# Altium PCB ESC.PcbDoc (part 2 of 3)
Units mm, origin at the board's own origin, x right, y up, seen from the top; angles counter-clockwise.
Board outline 85 x 45 mm, 4 copper layers (L1-SIGNAL/PWR, L2-PWR, L3-GND, L4-SIGNAL/PWR), stack 1.571 mm thick; 139 components, 88 nets, 499 pads, 911 vias.
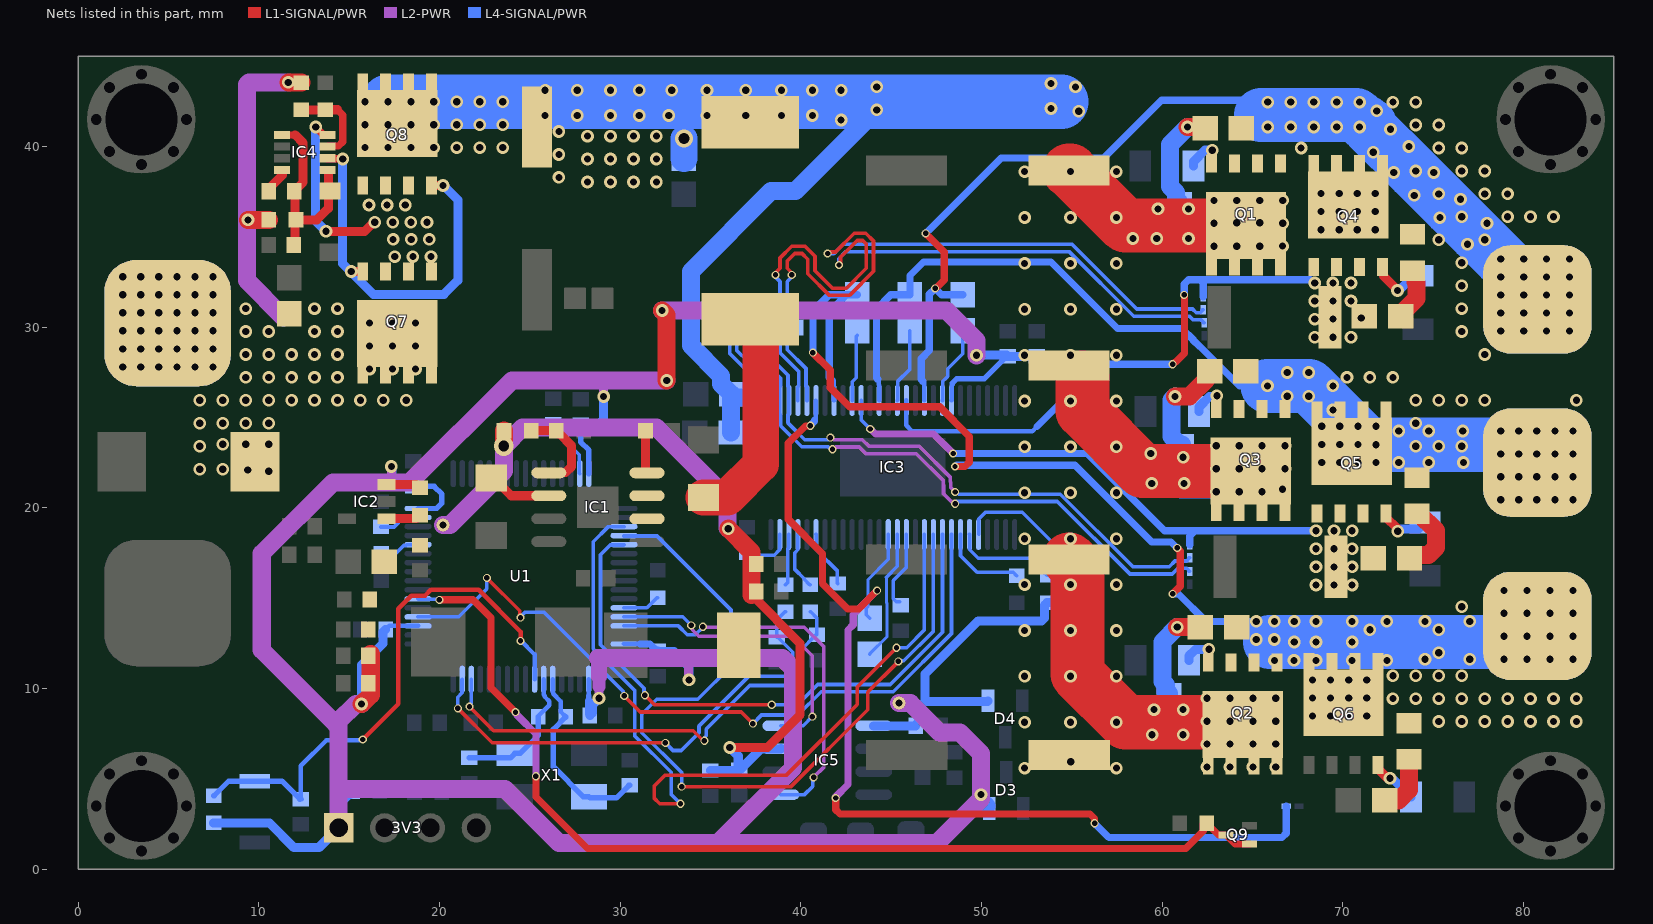
[diagram p4: the nets of this part, all layers, seen from the top]

## Via types
v1: diameter 0.7, hole 0.4, L1-SIGNAL/PWR to L4-SIGNAL/PWR, tented both sides, 386 vias
v2: diameter 0.7, hole 0.4, L1-SIGNAL/PWR to L4-SIGNAL/PWR, 181 vias
v3: diameter 0.7, hole 0.4, L1-SIGNAL/PWR to L4-SIGNAL/PWR, tented bottom, 112 vias
v4: diameter 0.45, hole 0.3, L1-SIGNAL/PWR to L4-SIGNAL/PWR, tented both sides, 87 vias
v5: diameter 0.7, hole 0.4, L1-SIGNAL/PWR to L2-PWR, tented both sides, 34 vias
v6: diameter 0.7, hole 0.4, L3-GND to L4-SIGNAL/PWR, tented both sides, 30 vias
v7: diameter 0.7, hole 0.4, L1-SIGNAL/PWR to L3-GND, 27 vias
v8: diameter 0.7, hole 0.4, L1-SIGNAL/PWR to L2-PWR, 21 vias
v9: diameter 0.7, hole 0.4, L3-GND to L4-SIGNAL/PWR, 10 vias
v10: diameter 1.1, hole 0.6, L1-SIGNAL/PWR to L4-SIGNAL/PWR, tented both sides, 10 vias
v11: diameter 0.7, hole 0.4, L1-SIGNAL/PWR to L3-GND, tented both sides, 8 vias
v12: diameter 1.1, hole 0.6, L3-GND to L4-SIGNAL/PWR, tented both sides, 3 vias
v13: diameter 0.7, hole 0.4, L1-SIGNAL/PWR to L4-SIGNAL/PWR, tented top, 1 vias
v14: diameter 1, hole 0.6, L1-SIGNAL/PWR to L4-SIGNAL/PWR, tented both sides, 1 vias

## Nets (pads, with @x,y where several pads share a name; then routed paths per layer and width w, separated by ;. In a path a pad name is that pad's centre, name@x,y a point inside that pad or via, vN(x,y) a via of type N, cw(c..) or ccw(c..) an arc to the next point about the centre after c; other vN are vias at no path point) (continued)
NetC9_2: C9.2 IC1.6 | length 3.6
  L1-SIGNAL/PWR w0.5: C9.2@22.86,21.659 22.981,21.659 23.971,20.669 IC1.6@26.048,20.669
NetC10_2: C10.2 R1.1 | length 5.9
  L1-SIGNAL/PWR w1: v1(61.404,41.084) 62.309,41.084 C10.2@62.373,41.021
  L4-SIGNAL/PWR w1: R1.1@60.96,36.907 60.838,36.907 60.771,36.973 60.771,37.45 60.437,37.785 60.437,40.117 v1(61.404,41.084)
NetC11_2: C11.2 R2.1 | length 5.7
  L1-SIGNAL/PWR w1: v1(60.708,26.166) 61.501,26.166 62.422,27.087 62.422,27.384 62.597,27.559 C11.2@62.627,27.559
  L4-SIGNAL/PWR w1: v1(60.708,26.166) 60.522,25.98 60.522,23.951 60.965,23.509 R2.1@61.087,23.509
NetC12_2: C12.2 R3.1 | length 5.5
  L1-SIGNAL/PWR w1: v1(60.833,13.399) C12.2@62.119,13.399
  L4-SIGNAL/PWR w1: R3.1@60.389,9.729 60.266,9.729 60.2,9.795 60.2,10.189 60.008,10.381 60.008,12.573 v1(60.833,13.399)
NetC13_1: C13.1 IC3.48 | length 4.3
  L4-SIGNAL/PWR w0.2: IC3.48@47.839,25.943 47.854,25.959 47.854,27.005 48.125,27.276 48.125,27.694 48.959,28.528 C13.1@48.959,29.794
NetC14_1: C14.1 IC3.15 | length 5.3
  L4-SIGNAL/PWR w0.17: C14.1@43.624,14.503 43.633,14.511 43.711,14.511 43.711,15.471 43.714,15.474 43.714,16.028 44.839,17.153
  L4-SIGNAL/PWR w0.2: C14.1@43.624,14.503 43.624,14.174 43.624,14.081 C14.1@43.815,13.891 ; 44.839,17.153 IC3.15@44.839,18.528
NetC14_2: C14.2 IC3.14 | length 7.3
  L4-SIGNAL/PWR w0.17: C14.2@43.815,11.89 43.815,11.92 44.775,12.88 44.775,14.714 44.731,14.758 44.731,16.156 44.738,16.163
  L4-SIGNAL/PWR w0.2: 44.738,16.163 45.339,16.764 IC3.14@45.339,18.528
NetC15_1: C15.1 IC3.43 | length 4.1
  L4-SIGNAL/PWR w0.2: IC3.43@45.339,25.943 45.354,25.959 45.354,26.989 46.038,27.672 C15.1@46.038,29.794
NetC16_2: C16.2 IC3.13 | length 4.3
  L4-SIGNAL/PWR w0.2: C16.2@45.471,14.797 45.289,14.797 45.116,14.97 45.116,15.975 45.839,16.698 IC3.13@45.839,18.528
NetC17_2: C17.2 R16.1 | length 3
  L1-SIGNAL/PWR w1: C17.2@73.193,30.719 73.341,30.719 73.405,30.782 73.405,30.93 74.074,31.6 74.074,32.47 74.039,32.505 74.039,33.067 73.973,33.133 R16.1@73.85,33.133
NetC18_2: C18.2 R17.1 | length 4.1
  L1-SIGNAL/PWR w1: C18.2@73.692,17.209 73.867,17.384 74.742,17.384 75.153,17.794 75.153,18.745 74.227,19.671 R17.1@74.105,19.671
NetC19_2: C19.2 R18.1 | length 3.3
  L1-SIGNAL/PWR w1: C19.2@72.311,3.81 73.074,3.81 73.66,4.396 R18.1@73.66,6.082
NetC20_1: C20.1 IC3.38 | length 3.7
  L4-SIGNAL/PWR w0.2: IC3.38@42.839,25.943 42.854,25.959 42.854,26.771 42.854,26.985 43.066,27.197 43.066,29.493 C20.1@43.116,29.543
NetC30_2: C30.2 IC3.23 | length 3.2
  L4-SIGNAL/PWR w0.2: IC3.23@40.839,18.528 40.854,18.513 40.854,17.673 40.899,17.629 42.025,16.502 42.025,15.825 C30.2@42.037,15.813
NetC31_1: C31.1 IC3.27 | length 2.9
  L4-SIGNAL/PWR w0.2: C31.1@37.02,17.525 37.174,17.371 38.521,17.371 38.824,17.673 38.824,18.513 IC3.27@38.839,18.528
NetC40_1: C40.1 IC4.4 | length 1.5
  L1-SIGNAL/PWR w0.4: IC4.4@11.275,38.699 11.278,38.699 11.303,38.674 11.303,38.417
  L1-SIGNAL/PWR w0.5: C40.1@10.548,37.528 10.548,37.663 11.303,38.417
NetC40_2: C40.2 C41.2 Dz1.1 IC4.1 IC4.5 R26.1 | length 11.6
  L1-SIGNAL/PWR w0.4: IC4.1@11.275,40.649 11.516,40.649 11.525,40.64 12.002,40.64 ; IC4.5@13.795,38.699 13.818,38.699 13.843,38.674 13.843,38.417
  L1-SIGNAL/PWR w0.5: C41.2@11.939,34.544 11.998,34.602 11.998,35.883 R26.1@12.056,35.941 ; 12.002,40.64 12.446,40.196 12.446,38.026 12.148,37.728 12.098,37.728 11.948,37.578 C40.2@11.948,37.528 12.002,37.474 12.002,35.995 R26.1@12.056,35.941 ; 13.843,38.417 13.843,37.625 Dz1.1@13.932,37.536 13.843,37.447 13.843,36.576 13.208,35.941 R26.1@12.056,35.941
NetC55_2: C55.2 U1.31 | length 2.3
  L4-SIGNAL/PWR w0.2: C55.2@16.757,18.943 17.482,18.943 17.985,19.445 18.792,19.445 U1.31@18.811,19.464
NetC56_2: C56.2 U1.47 | length 3.7
  L4-SIGNAL/PWR w0.2: C56.2@26.289,24.637 26.339,24.637 26.338,24.638 26.924,24.638 27.054,24.508 27.054,23.625 27.742,22.937 27.742,21.91 U1.47@27.761,21.891
NetIC1_4: IC1.4 R8.2 | length 2.4
  L1-SIGNAL/PWR w0.5: R8.2@31.403,24.277 31.403,21.986 31.45,21.939 IC1.4@31.488,21.939
NetIC1_5: IC1.5 R4.1 R11.1 | length 5.1
  L1-SIGNAL/PWR w0.5: R4.1@25.074,24.272 R11.1@26.47,24.272 26.47,24.244 26.624,24.09 26.652,24.09 27.305,23.438 27.305,22.283 26.981,21.959 26.067,21.959 IC1.5@26.048,21.939
NetIC2_3: IC2.3 R19.1 | length 1.9
  L1-SIGNAL/PWR w0.5: IC2.3@17.067,21.299 18.695,21.299 18.891,21.102 R19.1@18.92,21.102
NetIC3_5: IC3.5 R10.2 | length 8.1
  L4-SIGNAL/PWR w0.2: IC3.5@49.839,18.528 49.854,18.543 49.854,19.383 50.219,19.748 52.261,19.748 55.161,16.848 55.161,16.283 R10.2@55.182,16.262
NetIC3_6: IC3.6 R9.1 | length 6
  L4-SIGNAL/PWR w0.2: IC3.6@49.339,18.528 49.354,18.513 49.354,17.673 49.813,17.214 53.023,17.214 53.326,16.911 53.326,16.565 53.63,16.262 R9.1@53.658,16.262
NetIC3_7: IC3.7 R12.2 | length 4.7
  L4-SIGNAL/PWR w0.2: IC3.7@48.839,18.528 48.839,17.354 49.755,16.438 51.752,16.438 R12.2@51.943,16.247
NetIC3_25: IC3.25 R22.1 | length 3.2
  L4-SIGNAL/PWR w0.2: IC3.25@39.839,18.528 39.824,18.513 39.824,17.673 39.672,17.522 39.672,16.589 40.181,16.08 40.181,16.051 40.484,15.748 R22.1@40.513,15.748
NetIC3_26: IC3.26 R23.1 | length 2.9
  L4-SIGNAL/PWR w0.2: R23.1@39.15,15.748 39.272,15.871 39.272,17.723 39.339,17.789 IC3.26@39.339,18.528
NetIC4_6: IC4.6 Q7.4 Q8.4 | length 20.9
  L1-SIGNAL/PWR w0.4: IC4.6@13.795,39.349 13.815,39.329 14.618,39.329 v1(14.637,39.309)
  L1-SIGNAL/PWR w0.5: v1(15.113,33.084) 15.116,33.086 15.745,33.086 Q7.4@15.748,33.089 ; Q8.4@19.558,37.846 v1(20.193,37.846)
  L4-SIGNAL/PWR w0.5: v1(14.637,39.309) 14.637,33.514 16.338,31.813 20.238,31.813 21.018,32.594 21.018,37.045 20.218,37.846 v1(20.193,37.846)
NetIC4_7: IC4.7 R24.1 R25.2 | length 4.9
  L1-SIGNAL/PWR w0.4: IC4.7@13.795,39.999 13.82,40.024 14.411,40.024 14.645,40.258 14.645,41.743 14.351,42.037
  L1-SIGNAL/PWR w0.5: R24.1@12.345,42.034 R25.2@13.678,42.034 13.682,42.037 14.351,42.037
NetIC4_8: IC4.8 Q7.1 Q7.2 Q7.3 Q8.1 Q8.2 Q8.3 | length 9.8
  L1-SIGNAL/PWR w0.4: v1(13.144,41.084) 13.144,41.074 13.57,40.649 IC4.8@13.795,40.649
  L1-SIGNAL/PWR w0.5: v1(13.716,35.306) 15.853,35.306 16.361,35.814 v1(16.415,35.814)
  L4-SIGNAL/PWR w0.5: v1(13.144,41.084) 13.144,35.877 v1(13.716,35.306)
  other v1: 17.526,33.909 18.526,33.909 19.526,33.909 17.431,34.861 18.431,34.861 19.431,34.861 17.415,35.814 18.415,35.814 19.304,35.814 16.097,36.767 17.097,36.767 18.098,36.767
NetQ1_4: Q1.4 R5.2 | length 2.3
  L1-SIGNAL/PWR w0.5: Q1.4@62.738,39.058 62.757,39.078 62.757,39.776 v1(62.777,39.796)
  L4-SIGNAL/PWR w0.5: R5.2@61.74,38.925 61.74,39.172 62.364,39.796 v1(62.777,39.796)
NetQ2_4: Q2.4 R7.2 | length 2.3
  L1-SIGNAL/PWR w0.5: Q2.4@62.547,11.436 62.567,11.455 62.567,12.154 v1(62.586,12.173)
  L4-SIGNAL/PWR w0.5: R7.2@61.486,11.557 61.486,11.804 61.84,12.158 62.571,12.158 v1(62.586,12.173)
NetQ3_4: Q3.4 R6.2 | length 2.3
  L1-SIGNAL/PWR w0.5: Q3.4@62.992,25.469 63.011,25.489 63.011,26.192 v1(63.031,26.211)
  L4-SIGNAL/PWR w0.5: R6.2@62.039,25.336 62.039,25.583 62.629,26.173 62.993,26.173 v1(63.031,26.211)
NetQ4_4: Q4.4 R13.2 | length 3.1
  L1-SIGNAL/PWR w0.5: Q4.4@72.2,33.332 72.25,33.282 72.25,32.843 73.024,32.069 v1(73.024,32.035)
  L4-SIGNAL/PWR w0.5: v1(73.024,32.035) 73.062,32.073 73.146,32.073 73.921,32.848 R13.2@74.168,32.848
NetQ5_4: Q5.4 R14.2 | length 3
  L1-SIGNAL/PWR w0.5: Q5.4@72.39,19.679 72.39,19.479 73.006,18.863 73.006,18.738 v1(73.044,18.7)
  L4-SIGNAL/PWR w0.5: v1(73.044,18.7) 73.099,18.7 73.24,18.842 74.195,18.842 R14.2@74.549,19.195
NetQ6_4: Q6.4 R15.2 | length 2.8
  L1-SIGNAL/PWR w0.5: Q6.4@71.946,5.773 71.946,5.573 72.445,5.073 72.572,5.073 v1(72.61,5.035)
  L4-SIGNAL/PWR w0.5: v1(72.61,5.035) 72.648,4.997 72.772,4.997 73.168,4.601 73.415,4.601 73.769,4.247 R15.2@73.769,4
NetR28_1: R28.1 U1.28 | length 2.3
  L4-SIGNAL/PWR w0.2: R28.1@16.764,17.472 17.582,17.472 18.025,17.914 18.134,17.914 18.184,17.964 U1.28@18.811,17.964
NetR31_2: R31.2 U1.60 | length 2.1
  L4-SIGNAL/PWR w0.2: U1.60@30.211,14.464 31.481,14.464 32.049,15.033 R31.2@32.078,15.033
nSCS: IC3.8 U1.20 | length 42.3
  L1-SIGNAL/PWR w0.2: v4(22.619,16.12) 24.437,14.302 24.437,13.974 v4(24.485,13.926) ; v4(30.226,9.588) 31.115,8.7 36.703,8.7 v4(37.347,8.055)
  L4-SIGNAL/PWR w0.2: U1.20@18.811,13.964 21.07,13.964 22.619,15.513 v4(22.619,16.12) ; v4(24.485,13.926) 24.485,13.985 24.727,14.227 25.784,14.227 30.178,9.834 30.178,9.636 v4(30.226,9.588) ; v4(37.347,8.055) 37.824,8.532 39.837,8.532 41.129,9.824 45.118,9.824 48.339,13.045 IC3.8@48.339,18.528
OSC_IN: C57.2 R30.2 U1.5 X1.3 | length 10.7
  L4-SIGNAL/PWR w0.25: U1.5@26.261,10.514 26.271,10.505 26.271,9.801 26.286,9.786 26.286,9.717 26.701,9.303 26.701,8.724 R30.2@26.979,8.445
  L4-SIGNAL/PWR w0.3: R30.2@26.979,8.445 26.979,8.417 26.301,7.739 26.301,5.673 27.967,4.007 X1.3@28.267,4.007 28.33,3.944 29.795,3.944 30.485,4.634 C57.2@30.535,4.634
OSC_OUT: C58.1 R30.1 U1.6 X1.1 | length 7.8
  L4-SIGNAL/PWR w0.25: R30.1@25.472,8.445 25.472,8.474 26.079,9.081 26.079,9.288 25.836,9.531 25.836,9.599 25.77,9.665 25.77,10.505 U1.6@25.761,10.514
  L4-SIGNAL/PWR w0.3: C58.1@21.645,6.161 23.921,6.161 X1.1@24.167,6.407 24.467,6.407 25.472,7.412 R30.1@25.472,8.445
POWER_BUCK: C4.1 IC1.2 IC1.3 L1.2 | length 12.5
  L1-SIGNAL/PWR w2: C4.1@34.622,20.574 35.941,20.574 37.782,22.415 37.782,30.231 37.333,30.681 L1.2@37.211,30.681
POWER_IN: +.1 C21.2 D2.2 pad.1@4.953,30.226 Q7.5 Q7.6 Q7.7 Q7.8 Q7.9 R24.2 R26.2 | length 17.9
  L1-SIGNAL/PWR w1: v1(9.398,35.941) R26.2@10.55,35.941 ; v1(11.632,43.55) 11.641,43.54 R24.2@12.345,43.54
  L2-PWR w1: 11.367,30.543 9.335,32.575 9.335,43.434 9.45,43.55 v1(11.632,43.55)
  other v1: 6.731,22.14 8.001,22.14 6.731,23.41 8.001,23.522 6.731,24.68 8.001,24.68 9.271,24.68 10.541,24.68 6.731,25.95 8.001,25.95 9.271,25.95 10.541,25.95 11.811,25.95 13.081,25.95 14.351,25.95 15.621,25.95 16.891,25.95 18.161,25.95 9.271,27.22 10.541,27.22 11.811,27.22 13.081,27.22 14.351,27.22 9.271,28.49 10.541,28.49 11.811,28.49 13.081,28.49 14.351,28.49 9.271,29.76 10.541,29.76 13.081,29.76 14.351,29.76 9.271,31.03 13.081,31.03 14.351,31.03
  other v2: 2.461,27.798 3.461,27.798 4.461,27.798 5.461,27.798 6.461,27.798 7.461,27.798 2.461,28.798 3.461,28.798 4.461,28.798 5.461,28.798 6.461,28.798 7.461,28.798 2.461,29.798 3.461,29.798 4.461,29.798 5.461,29.798 6.461,29.798 7.461,29.798 2.461,30.797 3.461,30.797 4.461,30.797 5.461,30.797 6.461,30.797 7.461,30.797 2.461,31.798 3.461,31.798 4.461,31.798 5.461,31.798 6.461,31.798 7.461,31.798 2.461,32.798 3.461,32.798 4.461,32.798 5.461,32.798 6.461,32.798 7.461,32.798
  other v3: 10.541,22.028 9.383,22.099 9.271,23.522 10.541,23.522 16.129,27.686 17.399,27.686 18.669,27.686 16.129,28.956 17.399,28.956 18.669,28.956 16.129,30.226 17.399,30.226 18.669,30.226
POWER_LOAD: C5.2 C8.1 C34.2 C35.2 C36.1 C37.1 C38.1 C39.1 IC3.29 L1.1 Q1.5 Q1.6 Q1.7 Q1.8 Q1.9 Q2.5 Q2.6 Q2.7 Q2.8 Q2.9 Q3.5 Q3.6 Q3.7 Q3.8 Q3.9 Q8.5 Q8.6 Q8.7 Q8.8 Q8.9 R1.2 R2.2 R3.2 | length 119.2
  L1-SIGNAL/PWR w3: C38.1@54.847,17.145 55.308,16.683 55.308,10.795 57.975,8.128 Q2.9@63.754,8.128 ; C36.1@54.847,38.672 54.922,38.672 57.97,35.623 Q1.9@64.643,35.623 ; C37.1@55.597,27.202 55.597,25.366 58.928,22.034 Q3.9@64.897,22.034
  L4-SIGNAL/PWR w0.25: 37.782,25.908 37.818,25.943 IC3.29@38.339,25.943
  L4-SIGNAL/PWR w1: C34.2@36.138,24.168 C35.2@36.138,26.114 ; C35.2@36.153,26.289 35.588,26.854 35.588,27.298 33.909,28.977 33.909,33.084 38.354,37.529 39.695,37.529 v2(44.196,42.03) v2(44.196,43.3) ; C35.2@36.183,26.114 37.577,26.114 37.782,25.908
  L4-SIGNAL/PWR w1.5: C5.2@33.528,39.354 v14(33.528,40.45) ; R1.2@60.96,34.907 66.022,34.907
  L4-SIGNAL/PWR w2: R3.2@60.389,7.729 65.133,7.729 ; R2.2@61.087,21.509 65.232,21.509
  L4-SIGNAL/PWR w3: v2(17.145,42.481) v2(18.415,42.481) v2(19.685,42.481) v1(20.955,42.481) v1(22.225,42.481) v1(23.495,42.481) 36.957,42.481 54.432,42.481
  other v1: 62.484,9.461 63.754,9.461 65.024,9.461 28.194,38.036 29.464,38.036 30.734,38.036 32.004,38.036 26.607,38.291 28.194,39.306 29.464,39.306 30.734,39.306 32.004,39.306 26.607,39.56 15.875,39.941 17.145,39.941 18.415,39.941 19.685,39.941 20.955,39.941 22.225,39.941 23.495,39.941 28.194,40.576 29.464,40.576 30.734,40.576 32.004,40.576 26.607,40.831 20.955,41.211 22.225,41.211 23.495,41.211
  other v2: 15.875,41.211 17.145,41.211 18.415,41.211 19.685,41.211 42.227,41.465 25.832,41.719 27.622,41.719 29.464,41.719 31.051,41.719 32.684,41.719 34.808,41.719 36.957,41.719 38.925,41.719 40.64,41.719 55.387,41.948 53.848,42.106 15.875,42.481 25.845,43.116 27.622,43.116 29.464,43.116 31.051,43.116 32.854,43.116 34.808,43.116 36.957,43.116 38.925,43.116 40.64,43.116 42.227,43.116 55.2,43.3 53.848,43.486
  other v3: 62.484,5.651 63.754,5.651 65.024,5.651 66.294,5.651 62.484,6.921 63.754,6.921 65.024,6.921 66.294,6.921 62.484,8.191 63.754,8.191 65.024,8.191 66.294,8.191 66.294,9.461 62.992,20.892 64.262,20.892 65.532,20.892 66.669,21.025 62.992,22.162 64.262,22.162 65.532,22.162 66.802,22.162 62.992,23.431 64.262,23.431 65.532,23.431 66.802,23.431 62.865,34.48 64.135,34.48 65.405,34.48 66.669,34.487 62.865,35.75 66.675,35.75 64.135,35.782 65.405,35.782 62.865,37.02 64.135,37.02 65.405,37.02 66.675,37.02
  other v5: 52.387,5.593 57.468,5.593 52.387,8.133 54.927,8.133 52.387,10.673 54.927,10.673 52.387,13.213 54.927,13.213 57.468,13.213 52.387,15.753 54.927,15.753 57.468,15.753 52.387,18.293 54.927,18.293 57.468,18.293 52.387,20.833 54.927,20.833 57.468,20.833 52.387,23.373 54.927,23.373 52.387,25.913 57.468,25.913 52.387,28.453 57.468,28.453 52.387,30.993 54.927,30.993 57.468,30.993 52.387,33.533 54.927,33.533 57.468,33.533 52.387,36.073 54.927,36.073 52.387,38.613 57.468,38.613
  other v8: 54.938,5.946 59.445,7.435 61.161,7.435 57.468,8.133 59.551,8.831 61.161,8.831 57.468,10.673 59.424,21.353 61.217,21.353 61.159,22.796 59.374,23.01 57.468,23.373 54.927,25.913 54.927,28.453 58.379,34.907 59.699,34.907 61.46,34.907 57.468,36.073 59.771,36.547 61.46,36.547 54.927,38.613
RESET: C51.1 R27.1 SW1.1 U1.7 | length 30.7
  L1-SIGNAL/PWR w0.25: v4(15.748,7.175) 17.716,9.144 17.716,14.414 18.439,15.137 19.2,15.137 19.521,15.458 22.175,15.458 24.485,13.149 v4(24.485,12.636)
  L4-SIGNAL/PWR w0.25: C51.1@12.269,3.875 C51.1@12.319,3.875 ; C51.1@12.369,3.875 C51.1@12.319,3.875 ; v4(15.748,7.175) 15.71,7.137 13.741,7.137 12.319,5.715 C51.1@12.319,3.875 ; v4@24.485,12.674 v4(24.485,12.636) 24.511,12.636 25.261,11.886 U1.7@25.261,10.514
  L4-SIGNAL/PWR w0.3: R27.1@7.493,4.064 7.522,4.064 8.333,4.875 SW1.1@9.779,4.875 11.269,4.875 C51.1@12.269,3.875
RX: IC5.4 U1.61 | length 16.8
  L2-PWR w0.2: v4(33.936,13.495) 33.984,13.447 33.984,13.27 34.01,13.243 34.01,13.227 34.347,12.89 39.564,12.89 40.64,11.814 v4(40.64,8.445)
  L4-SIGNAL/PWR w0.2: U1.61@30.211,13.964 33.466,13.964 v4(33.936,13.495) ; IC5.4@38.895,7.938 40.132,7.938 v4(40.64,8.445)
S1_N: C28.2 IC3.33 J8.1 | length 43.4
  L1-SIGNAL/PWR w0.2: v4(39.497,32.893) 39.497,33.01 39.247,33.26 39.247,33.663 39.662,34.079 40.069,34.079 40.386,33.762 40.386,32.957 41.583,31.76 42.69,31.76 44.024,33.094 44.024,34.773 43.6,35.198 42.951,35.198 41.915,34.162 41.561,34.162 v4(41.478,34.079)
  L4-SIGNAL/PWR w0.2: v4(39.497,32.893) 39.497,32.776 39.247,32.526 39.247,30.445 39.364,30.328 39.446,30.328 39.746,30.028 C28.2@39.746,29.978 39.746,29.928 39.446,29.628 39.364,29.628 39.247,29.511 39.247,28.757 40.289,27.715 40.289,26.732 40.339,26.682 IC3.33@40.339,25.943 ; v4(41.478,34.079) 41.832,34.079 42.338,34.585 55.009,34.585 58.588,31.007 61.678,31.007 61.882,30.802 62.106,30.802 62.223,30.919 62.223,30.96 62.225,30.962 J8.1@62.275,30.962
S1_P: C28.1 IC3.32 J10.1 | length 42.1
  L1-SIGNAL/PWR w0.2: v4(38.597,32.893) 38.597,33.01 38.847,33.26 38.847,33.829 39.497,34.479 40.234,34.479 40.786,33.927 40.786,33.122 41.748,32.16 42.524,32.16 43.624,33.26 43.624,34.608 43.434,34.798 43.116,34.798 42.198,33.879 42.198,33.525 v4(42.115,33.443)
  L4-SIGNAL/PWR w0.2: v4(38.597,32.893) 38.597,32.776 38.847,32.526 38.847,30.445 38.729,30.328 38.647,30.328 38.347,30.028 C28.1@38.347,29.978 38.347,29.928 38.647,29.628 38.729,29.628 38.847,29.511 38.847,28.592 39.889,27.55 39.889,26.732 39.839,26.682 IC3.32@39.839,25.943 ; v4(42.115,33.443) 42.115,33.796 42.503,34.185 54.844,34.185 58.422,30.607 61.512,30.607 61.717,30.402 62.154,30.402 62.271,30.285 62.271,30.244 62.273,30.242 J10.1@62.323,30.242
S2_N: C29.2 IC3.31 J9.1 | length 33.8
  L2-PWR w0.2: v4(41.633,23.885) 41.701,23.885 41.815,23.771 43.406,23.771 43.775,23.402 46.557,23.402 48.28,21.679 48.28,21.438 48.294,21.424 48.294,21.121 48.536,20.879 v4(48.54,20.879) v4@48.54,20.904
  L4-SIGNAL/PWR w0.2: C29.2@36.96,29.978 36.96,29.928 36.66,29.628 36.577,29.628 36.46,29.511 36.46,28.709 37.053,28.115 38.512,28.115 39.289,27.339 39.289,26.732 39.339,26.682 IC3.31@39.339,25.943 39.339,25.204 39.289,25.154 39.289,24.702 40.215,23.775 41.523,23.775 v4(41.633,23.885) ; v4(48.54,20.879) 48.608,20.879 48.733,20.754 54.367,20.754 58.384,16.736 60.391,16.736 60.713,17.059 61.362,17.059 61.479,17.176 61.479,17.232 61.481,17.234 J9.1@61.531,17.234
S2_P: C29.1 IC3.30 J11.1 | length 34.5
  L2-PWR w0.2: v4(41.751,23.246) 41.819,23.246 41.944,23.371 43.24,23.371 43.609,23.002 46.391,23.002 47.88,21.513 47.88,21.272 47.894,21.258 47.894,20.783 48.323,20.354 48.348,20.354 48.473,20.229 v4(48.54,20.229)
  L4-SIGNAL/PWR w0.2: C29.1@35.56,29.978 35.56,29.928 35.86,29.628 35.943,29.628 36.06,29.511 36.06,29.274 ; 36.06,29.226 36.06,28.543 36.888,27.715 38.347,27.715 38.889,27.173 38.889,26.732 38.839,26.682 IC3.30@38.839,25.943 38.839,25.204 38.889,25.154 38.889,24.536 40.049,23.375 41.506,23.375 v4@41.631,23.25 ; v4@48.507,20.229 48.632,20.354 54.201,20.354 58.218,16.337 60.556,16.337 60.879,16.659 61.362,16.659 61.479,16.542 61.479,16.486 61.481,16.485 J11.1@61.531,16.485
SCLK: IC3.11 U1.51 | length 45.2
  L1-SIGNAL/PWR w0.2: v4(33.337,3.619) 32.194,3.619 31.877,3.937 31.877,4.584 32.5,5.207 39.211,5.207 43.123,9.119 43.123,10.088 v4(45.293,12.258)
  L4-SIGNAL/PWR w0.2: U1.51@30.211,18.964 30.192,18.945 29.327,18.945 28.511,18.13 28.511,12.192 30.797,9.906 30.797,7.39 32.829,5.358 32.829,4.127 v4(33.337,3.619) ; v4(45.293,12.258) 45.855,12.258 46.839,13.242 IC3.11@46.839,18.528
SDI: IC3.9 U1.53 | length 34.1
  L1-SIGNAL/PWR w0.2: v4(31.369,9.626) 31.895,9.099 v4(38.392,9.099)
  L4-SIGNAL/PWR w0.2: U1.53@30.211,17.964 30.192,17.945 29.456,17.945 28.911,17.401 28.911,12.427 31.321,10.017 31.321,9.673 v4(31.369,9.626) ; v4(38.392,9.099) 39.813,9.099 40.937,10.223 44.952,10.223 47.839,13.11 IC3.9@47.839,18.528
SDO: IC3.10 U1.52 | length 45.1
  L1-SIGNAL/PWR w0.2: v4(33.401,4.572) 39.453,4.572 43.705,8.824 43.705,9.802 v4(45.402,11.498)
  L4-SIGNAL/PWR w0.2: U1.52@30.211,18.439 32.043,18.439 36.131,14.351 36.131,11.238 34.291,9.398 32.023,9.398 31.197,8.572 31.197,7.556 33.401,5.352 v4(33.401,4.572) ; v4(45.402,11.498) 45.444,11.54 45.703,11.54 47.339,13.176 IC3.10@47.339,18.528
SH_A: "MOTOR U.1" C10.1 C13.2 IC3.46 Q1.1 Q1.2 Q1.3 Q4.5 Q4.6 Q4.7 Q4.8 Q4.9 R16.2 | length 53.2
  L1-SIGNAL/PWR w0.4: v4(46.909,35.19) 47.942,34.156 47.942,32.617 47.484,32.158 47.444,32.158 v4(47.434,32.149)
  L4-SIGNAL/PWR w0.25: 46.754,27.006 46.833,26.927 46.833,25.949 IC3.46@46.839,25.943
  L4-SIGNAL/PWR w0.4: 46.754,27.006 46.754,27.026 46.661,27.119 46.661,28.253 47.113,28.704 47.113,31.827 v4(47.434,32.149) 47.79,31.794 C13.2@48.959,31.794 ; v4(46.909,35.19) 51.089,39.37 56.769,39.37 59.958,42.559 64.971,42.559 65.07,42.46 65.151,42.46
  L4-SIGNAL/PWR w3: 65.482,41.749 67.12,41.749 68.389,41.749 70.737,41.749 71.146,41.34 71.27,41.34 71.42,41.19 71.501,41.19 ; 71.417,41.105 73.956,38.566 75.978,36.544 77.375,35.147 v2(78.74,33.782) 79.375,33.147 80.51,32.012 80.878,31.644 81.09,31.432
  other v1: 77.851,28.49 76.581,29.76 76.581,31.03 76.581,32.3 76.581,33.57 76.898,34.585 75.311,34.84 77.851,34.84 77.978,35.75 75.374,36.068 76.581,36.11 79.121,36.11 80.391,36.11 81.661,36.11 76.517,37.084 73.957,37.295 75.311,37.38 77.851,37.38 79.121,37.38 72.817,38.565 75.036,38.565 74.041,38.65 76.581,38.65 77.851,38.65 71.691,39.688 67.691,39.92 75.311,39.92 76.581,39.92 73.66,40.005 72.644,40.957 65.849,41.084 67.12,41.084 68.389,41.084 69.659,41.084 70.929,41.084 74.041,41.19 75.311,41.19 71.882,41.973 65.849,42.46 67.12,42.46 68.389,42.46 69.659,42.46 70.929,42.46 72.771,42.46 74.041,42.46
  other v2: 78.74,29.782 80.01,29.782 81.28,29.782 82.55,29.782 78.74,30.782 80.01,30.782 81.28,30.782 82.55,30.782 78.74,31.782 80.01,31.782 81.28,31.782 82.55,31.782 78.74,32.782 80.01,32.782 81.28,32.782 82.55,32.782 80.01,33.782 81.28,33.782 82.55,33.782
  other v3: 68.8,35.4 69.8,35.4 70.8,35.4 71.8,35.4 68.8,36.4 69.8,36.4 70.8,36.4 71.8,36.4 68.8,37.4 69.8,37.4 70.8,37.4 71.8,37.4
SH_B: "MOTOR V.1" C11.1 C15.2 IC3.41 Q3.1 Q3.2 Q3.3 Q5.5 Q5.6 Q5.7 Q5.8 Q5.9 R17.2 | length 48
  L4-SIGNAL/PWR w0.25: 44.254,27.124 44.304,27.075 44.304,26.805 44.333,26.776 44.333,25.949 IC3.41@44.339,25.943
  L4-SIGNAL/PWR w0.4: 44.254,27.124 44.183,27.196 44.183,28.914 44.192,28.923 44.192,30.664 44.183,30.673 44.183,31.005 44.971,31.794 C15.2@46.038,31.794 46.047,31.803 46.047,32.864 46.787,33.605 53.849,33.605 57.525,29.929 61.102,29.929 61.723,29.307 61.723,29.283 62.075,28.931 62.1,28.931 64.281,26.749 v1(65.834,26.749)
  L4-SIGNAL/PWR w3: v1(65.834,26.749) 68.12,26.749 71.374,23.495 79.777,23.495 80.772,22.5
  other v1: 73.094,22.511 74.76,22.511 76.676,22.511 74.041,23.41 75.311,23.41 76.581,23.41 73.094,24.257 74.76,24.257 76.644,24.257 74.041,24.68 69.453,25.416 74.041,25.95 75.311,25.95 76.581,25.95 77.851,25.95 82.931,25.95 66.929,26.173 68.12,26.173 69.453,26.749 70.231,27.22 71.501,27.22 72.771,27.22 66.929,27.495 68.12,27.495
  other v2: 78.74,20.448 79.74,20.448 80.74,20.448 81.74,20.448 82.74,20.448 78.74,21.718 79.74,21.718 80.74,21.718 81.74,21.718 82.74,21.718 78.74,22.988 79.74,22.988 80.74,22.988 81.74,22.988 82.74,22.988 78.74,24.258 79.74,24.258 80.74,24.258 81.74,24.258 82.74,24.258
  other v3: 68.834,22.511 69.834,22.511 70.834,22.511 71.834,22.511 71.834,23.495 68.834,23.511 69.834,23.511 70.834,23.511 68.834,24.511 69.834,24.511 70.834,24.511 71.834,24.511
SH_C: "MOTOR W.1" C12.1 C20.2 IC3.36 Q2.1 Q2.2 Q2.3 Q6.5 Q6.6 Q6.7 Q6.8 Q6.9 R18.2 | length 63.1
  L1-SIGNAL/PWR w0.4: v4(40.666,28.592) 41.633,27.625 41.633,26.646 42.689,25.59 47.689,25.59 49.324,23.955 49.324,22.523 49.09,22.288 v4@48.548,22.288 ; v4(60.579,15.24) 61.005,15.666 61.005,17.595 60.833,17.766 v4(60.833,17.78)
  L4-SIGNAL/PWR w0.2: v4(60.579,15.24) v4@60.591,15.228
  L4-SIGNAL/PWR w0.25: 41.754,27.006 41.833,26.927 41.833,25.949 IC3.36@41.839,25.943
  L4-SIGNAL/PWR w0.4: v4(40.666,28.592) 40.666,30.887 41.573,31.794 C20.2@42.525,31.794 ; 41.754,27.006 41.754,27.042 41.573,27.224 41.573,30.841 C20.2@42.525,31.794 ; C20.2@43.116,31.794 43.116,31.803 43.107,31.794 C20.2@42.525,31.794 ; v4(48.535,22.288) 48.548,22.288 48.612,22.352 55.181,22.352 59.424,18.109 60.49,18.109 60.819,17.78 v4(60.833,17.78) ; v4@60.591,15.228 60.909,15.228 62.42,13.716 v1(65.215,13.716)
  L4-SIGNAL/PWR w3: v1@65.977,12.573 80.613,12.573 81.47,13.43
  other v1: 75.311,8.17 76.581,8.17 77.851,8.17 79.121,8.17 80.391,8.17 81.661,8.17 82.931,8.17 72.771,9.44 74.041,9.44 75.311,9.44 76.581,9.44 77.851,9.44 79.121,9.44 80.391,9.44 81.661,9.44 82.931,9.44 72.771,10.71 74.041,10.71 75.311,10.71 76.581,10.71 66.215,11.557 67.297,11.557 68.516,11.557 70.517,11.557 72.44,11.557 74.549,11.62 77.025,11.62 75.311,11.98 67.31,12.573 68.516,12.573 70.517,12.573 65.215,12.716 66.215,12.716 71.501,13.25 75.311,13.25 66.215,13.716 67.31,13.716 68.516,13.716 70.517,13.716 72.44,13.716 74.549,13.716 77.025,13.716 76.581,14.52
  other v2: 78.93,11.62 80.2,11.62 81.47,11.62 82.74,11.62 78.93,12.89 80.2,12.89 81.47,12.89 82.74,12.89 78.93,14.16 80.2,14.16 81.47,14.16 82.74,14.16 78.93,15.43 80.2,15.43 81.47,15.43 82.74,15.43
  other v3: 68.326,8.477 69.326,8.477 70.326,8.477 71.326,8.477 68.326,9.477 69.326,9.477 70.326,9.477 71.326,9.477 68.326,10.477 69.326,10.477 70.326,10.477 71.326,10.477
SL_A: C17.1 IC3.44 J8.2 Q4.1 Q4.2 Q4.3 R20.2 | length 31
  L1-SIGNAL/PWR w0.4: v4(60.579,27.951) 60.593,27.951 60.721,28.079 60.758,28.079 61.237,28.558 61.237,31.729 61.227,31.739 61.227,31.779 v4(61.218,31.789)
  L4-SIGNAL/PWR w0.2: J8.2@62.271,31.668 J8.2@62.275,31.673
  L4-SIGNAL/PWR w0.25: IC3.44@45.839,25.943 45.839,24.565 46.157,24.246 52.821,24.246 53.075,24.5
  L4-SIGNAL/PWR w0.4: 53.075,24.5 56.526,27.951 v4(60.579,27.951) ; v4@61.218,31.803 61.218,32.385 61.46,32.627 62.106,32.627 ; J8.2@62.275,31.673 62.275,32.458 62.106,32.627 ; v1(68.453,32.448) 68.372,32.448 68.193,32.627 62.106,32.627
  other v1: 68.453,29.449 70.453,29.449 68.453,30.448 68.453,31.448 70.453,31.448 69.453,32.448 70.453,32.448
  other v2: 71.025,30.512
  other v3: 69.453,29.449 69.453,30.448 69.453,31.448
SL_B: C18.1 IC3.39 J9.2 Q5.1 Q5.2 Q5.3 R21.2 | length 29.6
  L2-PWR w0.4: v4(43.841,24.366) 43.854,24.366 44.127,24.094 47.343,24.094 v4@48.417,23.02
  L4-SIGNAL/PWR w0.2: IC3.39@43.339,25.943 43.354,25.928 43.354,24.853 v4(43.841,24.366)
  L4-SIGNAL/PWR w0.4: v4(48.426,23.01) 55.857,23.01 60.135,18.732 61.806,18.732 62.045,18.732 ; J9.2@61.531,17.945 61.531,18.438 61.806,18.713 ; 62.065,18.732 v1(68.516,18.732)
  other v1: 68.516,15.733 70.517,15.733 68.516,16.732 68.516,17.732 69.517,18.732 70.517,18.732
  other v3: 69.517,15.733 69.517,16.732 70.517,16.732 69.517,17.732 70.517,17.732
SL_C: IC3.34 J7.1 | length 56.1
  L1-SIGNAL/PWR w0.4: v4(40.525,24.545) 40.515,24.535 40.257,24.535 39.306,23.585 39.306,19.362 41.192,17.476 41.192,15.807 42.592,14.407 43.206,14.407 v4(44.221,15.422) ; v4(41.927,3.937) 41.934,3.93 41.934,3.282 42.168,3.048 56.002,3.048 56.251,2.798 56.251,2.55 v4(56.261,2.54)
  L2-PWR w0.4: v4(41.927,3.937) 41.927,4.005 42.608,4.686 42.608,13.242 42.895,13.529 42.895,14.096 v4(44.221,15.422)
  L4-SIGNAL/PWR w0.25: 40.758,24.853 40.833,24.928 IC3.34@40.833,25.937
  L4-SIGNAL/PWR w0.4: v4(40.525,24.545) 40.525,24.559 40.758,24.791 40.758,24.853 ; v4(56.261,2.54) 57.051,1.75 66.631,1.75 66.865,1.984 J7.1@66.865,3.492
SO1: C32.2 R22.2 U1.14 | length 26.6
  L1-SIGNAL/PWR w0.2: v4(21.66,8.998) 22.993,7.666 34.039,7.666 34.596,7.109 v4(34.663,7.109)
  L4-SIGNAL/PWR w0.2: v4(21.66,8.998) 21.66,9.066 21.761,9.167 U1.14@21.761,10.514 ; v4(34.663,7.109) 34.711,7.157 34.711,7.334 34.76,7.383 34.76,7.755 37.171,10.165 39.529,10.165 39.96,10.597 39.96,12.091 40.841,12.972 C32.2@40.891,12.972 40.891,13.892 40.542,14.242 R22.2@40.513,14.242
SO2: C33.2 R23.2 U1.15 | length 27.2
  L1-SIGNAL/PWR w0.2: v4(21.018,8.898) 22.925,6.991 v4(32.505,6.991)
  L4-SIGNAL/PWR w0.2: v4(21.018,8.898) 21.006,8.91 21.006,9.523 21.242,9.759 21.242,10.495 U1.15@21.261,10.514 ; v4(32.505,6.991) 32.926,6.57 33.381,6.57 34.36,7.549 34.36,7.921 37.107,10.668 39.37,10.668 39.56,10.858 39.56,12.003 38.719,12.845 C33.2@38.669,12.845 38.669,13.76 38.818,13.91 38.818,13.938 39.121,14.242 R23.2@39.15,14.242
TEMP: Q9.1 Q9.3 R33.1 U1.22 | length 57.4
  L1-SIGNAL/PWR w0.4: v4(19.993,14.908) 21.858,14.908 22.851,13.915 22.851,10.043 v4(24.204,8.691) ; v4(25.336,5.143) 25.336,4 28.187,1.15 61.305,1.15 62.272,2.117 62.272,2.498 62.285,2.511 R33.1@62.475,2.511 ; R33.1@62.475,2.54 R33.1@62.475,2.511 ; Q9.1@64.834,1.397 64.034,1.397 Q9.3@63.534,1.897 63.118,1.897 62.707,2.308 62.678,2.308 R33.1@62.475,2.511
  L2-PWR w0.4: v4(24.204,8.691) 24.204,8.624 24.329,8.499 24.329,8.492 25.336,7.484 v4(25.336,5.143)
  L4-SIGNAL/PWR w0.2: U1.22@18.811,14.964 18.83,14.945 19.956,14.945 v4(19.993,14.908)
TX: IC5.1 U1.62 | length 21.9
  L2-PWR w0.2: v4(34.581,13.416) 34.598,13.399 40.196,13.399 41.278,12.316 41.278,5.655 v4(40.703,5.08)
  L4-SIGNAL/PWR w0.2: U1.62@30.211,13.464 33.224,13.464 33.72,12.968 34.151,12.968 34.581,13.397 v4(34.581,13.416) ; IC5.1@38.895,4.128 40.202,4.128 40.656,4.581 40.656,5.032 v4(40.703,5.08)
V_5V: C6.2 C7.2 C22.2 C48.2 C49.2 IC2.1 IC5.3 L2.2 R4.2 R19.2 | length 47.3
  L1-SIGNAL/PWR w0.5: IC2.1@17.067,19.399 18.695,19.399 18.891,19.596 R19.2@18.92,19.596 ; v1(36.068,6.731) 38.149,6.731 39.965,8.547 39.965,12.489 C7.2@37.274,15.18
  L1-SIGNAL/PWR w1: v10(23.558,23.431) 23.567,23.44 R4.2@23.567,24.272 ; v1(35.985,18.845) 37.274,17.556 37.274,16.891 C7.2@37.274,15.18
  L2-PWR w1: v1(20.193,19.05) 20.574,19.05 23.558,22.034 v10(23.558,23.431) 23.586,23.431 24.602,24.447 32.004,24.447 35.941,20.511 35.941,18.889 v1(35.985,18.845)
  L4-SIGNAL/PWR w0.5: C49.2@34.988,5.462 36.498,5.462 36.598,5.462 37.786,6.651 38.879,6.651 IC5.3@38.895,6.668 ; v1(36.068,6.731) 36.536,6.263 C48.2@36.536,5.5
VDD_SPI: 3V3.1 C1.2 C2.2 C25.2 C26.2 C27.2 C42.2 C43.2 C44.2 C45.2 C46.2 C47.2 C50.2 D3.2 D4.1 IC3.49 IC5.5 L3.2 R9.2 R10.1 R27.2 R32.2 U1.1 U1.19 U1.32 U1.48 U1.64 | length 210
  L1-SIGNAL/PWR w1: v1(15.684,9.144) 16.192,9.652 C27.2@16.192,11.901 ; v1(32.322,30.924) 32.575,30.67 v1(32.575,27.051)
  L2-PWR w0.5: 17.335,21.528 v1(17.335,22.288) ; v1(28.829,9.461) 28.829,10.096 ; v1(29.083,26.162) 29.083,27.051 ; 33.782,11.684 33.782,10.502 v1(33.807,10.477)
  L2-PWR w0.7: 28.829,10.096 28.829,10.668
  L2-PWR w0.9: 28.765,11.684 28.829,11.62 28.829,10.668
  L2-PWR w1: 3V3.1@14.414,2.286 14.414,4.445 ; v1(15.684,9.144) 15.367,9.144 14.414,8.191 ; 28.765,11.684 33.782,11.684 38.975,11.684 39.56,11.098 39.56,5.588 35.422,1.45 ; v1(32.322,30.924) 48.069,30.924 49.721,29.273 v1(49.721,28.448) ; v1(32.575,27.051) 29.083,27.051 24,27.051 18.348,21.399 14.097,21.399 10.16,17.462 10.16,12.128 14.256,8.033 14.414,8.191 ; v1(45.436,9.2) 46.057,9.2 47.686,7.571 48.803,7.571 49.974,6.399 v1(49.974,4.127) 49.974,3.888 47.537,1.45 35.422,1.45 ; 14.414,4.445 23.614,4.445 26.609,1.45 35.422,1.45 ; 14.414,4.445 14.414,8.191
  L4-SIGNAL/PWR w0.25: C47.2@17.019,13.272 17.212,13.464 U1.19@18.811,13.464 ; 28.258,9.588 28.258,10.511 U1.1@28.261,10.514 ; U1.64@30.211,12.464 31.115,12.464 ; IC3.49@48.339,25.943 48.345,25.949 48.345,26.807 48.387,26.849
  L4-SIGNAL/PWR w0.3: C46.2@18.542,21.191 19.703,21.191 20.13,20.765 20.13,20.256 19.837,19.964 U1.32@18.811,19.964 ; C45.2@27.812,24.613 27.812,23.651 28.261,23.202 U1.48@28.261,21.891 ; 28.258,9.335 28.258,9.588 ; C44.2@32.065,12.063 C44.2@32.085,12.083 ; 48.387,26.849 48.387,26.901 48.636,27.151 50.164,27.151 51.396,28.383 C1.2@51.446,28.383
  L4-SIGNAL/PWR w0.4: 28.258,9.335 28.258,8.571 C43.2@28.32,8.509 ; 31.115,12.464 31.654,12.464 32.055,12.063 C44.2@32.065,12.063
  L4-SIGNAL/PWR w0.5: R27.2@7.493,2.558 10.583,2.558 11.94,1.2 13.329,1.2 3V3.1@14.414,2.286 14.42,2.292 14.42,3.553 15.003,4.136 15.032,4.136 15.185,4.289 R32.2@15.185,4.318 ; v1(15.684,9.144) 15.684,11.303 16.881,12.499 16.881,13.133 C47.2@17.019,13.272 ; v1(17.335,22.288) 17.359,22.265 17.359,21.505 17.652,21.212 18.521,21.212 C46.2@18.542,21.191 ; C45.2@27.812,24.613 28.002,24.613 28.012,24.622 28.79,24.622 29.083,24.915 v1(29.083,26.162) ; C43.2@28.32,8.509 28.47,8.659 28.47,9.102 v1(28.829,9.461) ; C44.2@32.085,12.083 32.114,12.054 32.967,12.054 33.807,11.215 v1(33.807,10.477) ; IC5.5@44.036,7.938 C50.2@46.354,7.937 46.354,7.987 46.504,8.137 46.504,8.93 ; v1(45.436,9.2) 45.474,9.161 46.272,9.161 46.504,8.93 ; 46.711,9.137 46.504,8.93 ; v1(49.721,28.448) 51.382,28.448 C1.2@51.446,28.383 C2.2@53.054,28.383 ; D4.1@50.359,9.313 50.338,9.292 46.884,9.292 46.884,10.812 49.82,13.748 53.326,13.748 53.476,13.898 53.476,14.602 53.63,14.755 R9.2@53.658,14.755 R10.1@55.182,14.755
  L4-SIGNAL/PWR w1: v1(49.974,4.127) 49.974,3.78 D3.2@50.27,3.485
pads on no net: IC2.4 IC3.1 IC3.2 IC3.3 IC3.4 IC3.50 IC3.51 IC3.52 IC3.53 IC3.54 IC3.56 IC4.3 U1.2 U1.3 U1.4 U1.8 U1.9 U1.16 U1.17 U1.21 U1.23 U1.24 U1.25 U1.26 U1.27 U1.29 U1.30 U1.33 U1.37 U1.38 U1.39 U1.40 U1.44 U1.45 U1.50 U1.54 U1.55 U1.56 U1.57 U1.58 U1.59 U1.63

## Polygon pours and split planes (outlines as drawn)
GND on L1-SIGNAL/PWR "GND_L01_P006" (solid, pour order 6): 0,45 85,45 85,0 0,0
POWER_LOAD on L1-SIGNAL/PWR "POWER_LOAD_L01_P003" (solid, pour order 3): 15.494,38.925 15.494,44.069 59.755,44.069 59.755,38.098 60.325,37.529 67.31,37.529 67.31,32.829 58.864,32.829 58.864,25.654 60.579,23.939 67.183,23.939 67.183,18.986 58.864,18.986 58.864,10.541 59.499,9.906 66.739,9.906 66.739,3.746 50.863,3.746 50.863,40.132 42.481,40.132 42.227,39.878 42.227,35.623 26.607,35.623 23.304,38.925
GND on L1-SIGNAL/PWR "GND_L01_P007" (solid, pour order 7): 62.452,32.385 62.452,28.829 67.12,28.829 67.31,29.019 67.31,32.194 67.12,32.385
GND on L2-PWR "GND_L02_P004" (solid, pour order 4): 0,45 85,45 85,0 0,0
POWER_LOAD on L2-PWR "POWER_LOAD_L02_P000" (solid, pour order 0): 15.494,38.925 15.494,44.069 59.817,44.069 59.817,38.036 60.325,37.529 67.31,37.529 67.31,32.627 59.753,32.627 59.753,24.765 60.579,23.939 67.183,23.939 67.183,18.859 59.499,18.859 59.499,9.906 66.739,9.906 66.739,3.492 51.371,3.492 51.371,35.814 26.416,35.814 23.304,38.925
GND on L4-SIGNAL/PWR "GND_L04_P005" (solid, pour order 5): 0,45 85,45 85,0 0,0
GND on L3-GND (split plane): 84.49,0.51 0.51,0.51 0.51,44.49 84.49,44.49

## Keep-outs
Keep-Out Layer:
  the board outline again, w1.5

## Other copper
L1-SIGNAL/PWR:
  region net SL_B: 71.438,15.524 72.44,16.526 72.44,17.962 71.438,18.965 71.438,20.256
  region net SL_B: 68.135,20.256 68.135,14.922 71.438,14.922 71.438,20.256
  pour cut-out: 19.861,10.506 18.443,10.506 18.321,10.383 18.321,8.979 18.52,8.779 18.755,8.779 19.861,9.886
  pour cut-out: 30.732,16.853 30.183,17.402 30.183,18.753 27.763,18.753 27.684,18.674 27.684,18.257 29.088,16.853
  pour cut-out: 42.68,17.894 42.68,19.038 42.418,19.3 41.898,19.3 41.766,19.168 41.766,18.807
  pour cut-out: 31.06,32.555 31.817,31.798 31.567,31.548 31.567,27.496 31.502,27.431 29.395,27.431 27.239,29.587 27.239,30.195 29.599,32.555
  pour cut-out: 24.7,15.351 24.7,17.697 23.639,17.697 22.899,16.956 24.543,15.312 24.543,15.286 24.635,15.286
  pour cut-out: 48.82,19.553 50.339,19.553 50.354,19.568 50.354,20.965 49.271,20.965 48.82,20.513
  pour cut-out: 45.518,29.554 46.852,29.554 48.062,30.764 48.062,31.505 46.537,31.505 45.518,30.486
  pour cut-out: 48.255,27.038 50.197,25.097 50.289,25.097 50.354,25.162 50.354,35.915 48.18,35.915 48.255,35.839
  pour cut-out: 34.133,31.881 34.141,31.899 32.583,31.899 32.583,29.514 33.584,28.513 34.133,28.513
  pour cut-out: 39.29,24.788 40.407,24.788 40.951,25.332 40.927,25.356 40.927,27.51 39.924,28.513 39.29,28.513
  pour cut-out: 42.476,23.151 42.76,23.151 43.396,23.786 43.396,24.595 41.527,26.464 40.951,26.464 40.951,25.143 40.968,25.126 40.968,24.659
  pour cut-out: 13.867,20.275 16.495,20.275 16.563,20.343 16.563,21.962 16.426,22.099 13.867,22.099
  pour cut-out: 61.747,10.436 59.69,10.436 59.374,10.752 59.374,15.282 59.711,15.282 61.747,13.246
  pour cut-out: 59.374,32.32 59.965,32.32 60.035,32.249 60.035,25.739 59.888,25.592 59.647,25.592 59.374,25.865
  pour cut-out: 61.938,38.058 60.516,38.058 59.755,38.819 59.755,43.739 63.258,43.739 63.258,42.337 61.938,41.017
  pour cut-out: 73.833,29.368 75.384,29.368 75.412,29.396 75.375,29.432 75.375,31.117 74.956,31.117 73.833,29.993 73.833,29.949
  pour cut-out: 74.938,31.117 75.375,31.117 75.353,31.139 75.353,33.22 74.978,33.22 74.943,33.185 74.943,31.108
  pour cut-out: 43.206,13.701 43.206,13.362 43.705,12.863 45.017,14.175 45.037,14.175 45.037,14.633 44.747,14.923 43.525,13.701
  pour cut-out: 34.036,3.492 34.036,3.832 34.211,4.007 39.717,4.007 40.638,3.087 40.638,2.456 39.833,2.456 39.833,2.707 39.047,3.492 34.039,3.492
  pour cut-out: 26.449,5.588 26.494,5.633 26.494,5.758 30.833,5.758 32.062,4.529 32.062,2.456 29.022,2.456 26.449,5.03
  pour cut-out: 40.703,13.864 40.703,13.636 40.33,13.264 40.64,12.954 40.64,8.158 43.815,11.333 43.815,13.793 40.774,13.793
  pour cut-out: 35.008,18.604 34.796,16.605 34.796,14.232 33.491,14.232 33.427,14.296 33.427,15.118 32.152,15.118 31.837,15.432 32.245,15.84 32.245,18.604
  pour cut-out: 33.465,12.383 33.477,12.395 34.796,12.395 34.796,10.725 34.184,10.725 33.466,11.442 33.466,12.395
  pour cut-out: 38.408,10.355 38.483,10.43 38.483,12.679 38.705,12.679 39.209,12.176 39.209,10.16 38.602,10.16
  pour cut-out: 34.483,9.711 39.254,9.711 39.254,10.165 34.631,10.271 34.631,9.86
  pour cut-out: 23.685,10.033 25.199,10.033 24.631,9.465 24.239,9.465 23.66,10.043
  region net GND: 62.293,18.351 66.929,18.351 66.929,14.859 62.293,14.859
  region net GND: 23.368,34.608 26.607,34.608 26.607,29.845 23.356,29.845 23.356,34.596
  region net GND: 43.497,22.606 46.863,22.606 47.816,21.653 47.816,18.224 48.069,17.97 48.069,16.319 43.561,16.319 43.561,18.479 44.069,18.479 45.148,19.558 45.148,20.955
  region net VDD_SPI: 16.256,17.716 16.256,15.811 15.684,15.24 15.684,9.271 16.7,9.271 16.764,9.335 16.764,14.668 17.653,15.557 17.653,17.716
  region net A3V3: 15.621,19.748 12.7,19.748 12.7,16.256 15.621,16.256
  region net V_5V: 16.51,19.494 17.97,19.494 18.479,20.002 20.511,20.002 20.511,17.526 18.605,17.526 17.843,18.288 16.51,18.288
  region net V_5V: 35.306,10.604 37.973,10.604 37.973,17.462 35.306,17.462 35.306,14.287
  region net POWER_BUCK: 30.543,19.113 30.543,21.018 33.401,21.018 33.782,21.399 34.989,21.399 34.989,19.113
  region net NetC3_1: 25.209,18.479 25.209,10.351 32.956,10.351 32.956,14.922 28.829,14.922 28.384,15.367 28.384,17.209 27.114,18.479
  region net SH_B: 63.881,24.892 63.881,28.258 73.279,28.258 74.549,26.987 83.693,26.987 83.693,19.07 77.005,19.07 75.057,21.018 68.262,21.018 68.072,21.209 68.072,24.257 67.437,24.892
  region net SL_A: 68.072,33.846 68.072,28.892 71.374,28.892 71.374,33.846
  region net GND: 67.754,6.413 67.754,1.397 71.056,1.397 71.056,6.413
  region net V_5V: 19.367,20.002 18.479,20.002 18.479,17.526 19.367,17.526
  region net POWER_IN: 1.333,26.67 3.111,26.67 4.572,25.209 4.572,20.828 11.632,20.828 11.632,24.575 19.939,24.575 19.939,31.414 8.767,31.558 7.941,33.782 1.333,33.782
  region net NetIC4_8: 15.43,38.417 15.43,35.877 16.637,34.671 16.637,32.575 19.939,32.575 19.939,35.877 19.748,36.068 18.669,37.148 18.669,38.417
  region net SH_C: 63.436,10.858 63.436,14.351 75.882,14.351 78.168,16.637 83.693,16.637 83.693,7.366 67.754,7.366 67.691,7.429 67.691,10.096 66.929,10.858
  region net SH_A: 63.627,38.544 63.627,43.18 74.676,43.18 80.264,37.592 81.026,37.592 83.693,34.925 83.693,28.067 77.406,28.067 75.882,29.591 75.882,33.401 74.867,34.417 68.008,34.417 68.008,37.846 67.31,38.544
L2-PWR:
  pour cut-out: 39.86,18.254 40.921,19.315 40.921,23.74 40.08,24.582 39.59,24.582 39.59,18.523
  pour cut-out: 30.739,28.06 23.812,28.06 23.812,29.331 25.041,29.92 29.089,29.92
  pour cut-out: 22.599,28.902 20.576,28.902 20.576,25.275 20.641,25.21 20.733,25.21 23.3,27.777 23.3,28.201
  pour cut-out: 46.539,31.933 46.539,34.423 47.419,35.304 50.862,35.304 50.862,29.56 48.912,29.56
  pour cut-out: 16.487,22.408 16.486,22.41 16.486,24.065 19.365,24.065 19.43,24 19.43,23.908 17.931,22.408
  pour cut-out: 48.403,29.165 48.255,29.017 48.255,27.051 49.781,25.525 50.692,25.525 50.692,26.876
  pour cut-out: 43.37,29.909 43.37,27.196 39.402,27.196 36.852,29.746 36.852,29.82 36.96,29.928 36.972,29.916 43.354,29.916
  pour cut-out: 19.194,7.803 19.194,8.654 20.605,8.654 21.131,8.128 21.131,7.968 20.353,7.19 19.806,7.19
  pour cut-out: 18.542,10.604 19.353,10.604 19.389,10.641 19.389,9.546 18.896,9.053 18.848,9.053 18.534,9.367 18.534,10.597
  pour cut-out: 14.863,10.017 14.811,10.069 14.811,14.575 16.241,14.575 16.353,14.463 16.353,10.084 16.287,10.017
  pour cut-out: 12.387,14.575 12.338,14.526 12.338,11.415 12.3,11.415 11.169,12.546 11.169,15.112 11.85,15.112
  pour cut-out: 12.756,16.924 11.99,17.69 11.99,17.866 14.549,20.425 18.8,20.425 24.418,26.042 28.235,26.042 28.346,25.931 28.346,25.456 25.554,25.456 19.329,19.231 19.329,18.254 14.086,18.254
  pour cut-out: 48.462,3.806 48.462,2.459 42.824,2.459 44.172,3.806
  pour cut-out: 45.628,8.191 44.003,8.191 43.97,8.158 43.97,13.008 45.396,14.434 45.536,14.434 45.628,14.343
  pour cut-out: 32.014,2.459 32.079,2.524 32.079,2.616 27.855,6.84 26.952,6.84 26.952,2.859 27.352,2.459
  pour cut-out: 21.912,5.611 23.526,7.225 24.005,6.746 24.005,5.565 23.893,5.453 21.977,5.453 21.912,5.519
  pour cut-out: 18.183,5.454 18.248,5.519 18.248,6.568 16.501,8.315 15.423,7.237 15.423,5.454
  pour cut-out: 27.829,12.357 25.16,12.357 25.16,11.265 33.736,2.689 35.235,2.689 38.552,6.006 38.552,10.675 29.51,10.675
  pour cut-out: 25.141,14.535 39.868,14.535 40.227,14.177 38.407,12.357 25.16,12.357 25.16,14.517
  pour cut-out: 35.051,22.563 37.459,22.563 37.459,20.235 37.107,19.882 35.051,21.938
  pour cut-out: 23.295,19.876 23.064,20.107 23.064,21.484 25.019,23.439 25.374,23.439 25.487,23.326 25.487,21.977 23.386,19.876
  pour cut-out: 47.616,1.261 47.616,2.165 48.753,3.302 55.881,3.302 57.752,1.431 57.752,1.318 57.695,1.261
  pour cut-out: 60.009,14.564 60.405,14.96 63.103,14.96 63.241,14.822 63.017,14.598 63.017,10.507 62.927,10.416 60.009,10.416
  pour cut-out: 61.158,28.396 63.403,28.396 63.41,28.389 63.371,28.35 63.371,24.449 60.79,24.449 60.263,24.976 60.263,27.5 61.159,28.396
  pour cut-out: 61.938,38.058 60.516,38.058 59.755,38.819 59.755,43.739 63.258,43.739 63.258,42.337 61.938,41.017
  pour cut-out: 71.884,29.368 75.384,29.368 75.384,33.115 74.592,33.907 71.934,33.907 71.934,33.896 71.884,33.845
  region net SL_A: 68.072,33.846 68.072,28.892 71.374,28.892 71.374,33.846
  region net SH_A: 63.627,38.544 63.627,43.18 74.676,43.18 80.264,37.592 81.026,37.592 83.693,34.925 83.693,28.067 77.406,28.067 75.882,29.591 75.882,33.337 74.803,34.417 68.008,34.417 68.008,37.846 67.31,38.544
  region net POWER_IN: 1.333,26.67 3.332,26.67 4.847,25.155 4.847,20.955 11.62,20.955 11.62,24.575 20.066,24.575 20.066,31.432 10.351,31.432 8.001,33.782 1.333,33.782
  region net NetIC4_8: 15.43,38.354 15.43,35.814 16.637,34.608 16.637,32.512 19.939,32.512 19.939,35.814 19.748,36.004 18.669,37.084 18.669,38.354
  region net SL_B: 68.135,20.256 68.135,14.922 71.438,14.922 71.438,20.256
  region net SH_C: 63.436,10.858 63.436,14.351 75.882,14.351 78.168,16.637 83.693,16.637 83.693,7.366 67.754,7.366 67.691,7.429 67.691,10.096 66.929,10.858
  region net SH_B: 63.881,24.892 63.881,28.194 73.343,28.194 74.549,26.987 83.693,26.987 83.693,19.113 76.962,19.113 74.93,21.145 68.135,21.145 68.072,21.209 68.072,24.257 67.437,24.892
L4-SIGNAL/PWR:
  pour cut-out: 45.005,4.02 45.005,4.545 45.425,4.965 45.805,4.965 45.805,4.17 45.655,4.02
  pour cut-out: 47.602,4 47.602,4.142 47.631,4.171 49.125,4.171 49.57,3.725 49.57,2.473 49.129,2.473
  pour cut-out: 35.941,36.764 35.941,40.446 35.967,40.472 41.427,40.472 41.492,40.407 41.492,40.315 37.876,36.699 36.006,36.699
  pour cut-out: 34.703,35.306 35.917,36.52 35.941,36.52 35.941,40.408 35.877,40.472 34.808,40.472 34.703,40.366
  pour cut-out: 13.716,31.597 14.522,32.403 14.673,32.403 14.785,32.291 14.091,31.597
  pour cut-out: 10.121,31.142 12.231,31.142 12.324,31.049 12.324,29.372 12.199,29.247 11.423,29.247 10.028,30.642 10.028,31.049
  pour cut-out: 24.198,38.518 24.314,38.402 25.757,38.402 25.832,38.478 25.832,40.472 24.513,40.472 24.198,40.157
  pour cut-out: 49.016,14.105 48.951,14.17 48.951,16.155 49.016,16.22 50.617,16.22 51.493,15.344 52.726,15.344 52.726,14.511 52.321,14.105
  pour cut-out: 42.78,33.084 42.78,33.487 42.867,33.573 45.535,33.573 45.535,33.217 45.358,33.041 45.358,32.999 44.629,32.269 44.357,32.269 44.292,32.334 43.53,32.334
  pour cut-out: 14.892,8.816 14.892,7.756 15.303,7.756 15.356,7.809 15.356,8.352
  pour cut-out: 18.724,11.652 18.724,11.744 18.485,11.982 17.434,11.982 16.441,10.99 16.441,9.609 16.498,9.552 16.624,9.552
  pour cut-out: 22.373,23.72 23.126,24.473 24.149,24.473 24.149,27.567 24.046,27.671 23.964,27.671 22.373,26.08
  pour cut-out: 21.818,11.829 21.818,11.943 23.609,13.734 23.997,13.346 23.997,12.293 23.456,11.752 21.895,11.752
  pour cut-out: 21.043,18.938 21.043,18.962 22.314,20.233 21.909,20.638 20.785,20.638 20.715,20.568 20.715,19.266
  pour cut-out: 20.18,18.191 23.3,18.191 23.359,18.132 23.359,16.788 21.269,14.698 20.939,14.698 20.053,15.585 20.053,18.064
  pour cut-out: 24.781,19.803 27.726,19.803 27.791,19.738 27.791,19.646 24.74,16.595 24.648,16.595 24.583,16.66 24.583,19.604
  pour cut-out: 25.936,11.786 27.161,11.786 27.204,11.829 27.204,11.942 25.531,13.616 25.142,13.616 24.972,13.445 24.972,12.75
  pour cut-out: 25.187,15.09 25.187,15.182 25.122,15.247 27.719,17.843 27.858,17.843 27.9,17.802 27.9,13.199 27.835,13.134 27.143,13.134
  pour cut-out: 33.167,14.733 33.232,14.668 33.167,14.733 33.945,15.512 34.106,15.512 35.52,14.098 35.52,11.443 34.818,10.741 34.768,10.741 33.892,11.617 33.957,12.356 33.167,13.146
  pour cut-out: 33.01,16.522 33.027,16.539 33.922,15.645 33.936,15.645 33.936,15.502 33.01,14.576
  pour cut-out: 41.841,13.411 41.943,13.512 42.639,13.512 42.64,13.513 42.64,10.835 41.841,10.835
  pour cut-out: 37.343,24.855 37.437,24.949 37.913,24.949 38.994,23.868 38.994,23.473 38.929,23.408 37.408,23.408 37.343,23.473
  pour cut-out: 31.455,19.051 31.455,19.443 31.619,19.607 31.964,19.263 35.53,19.263 38.218,16.575 38.218,12.458 37.719,11.959 36.825,11.959 36.697,12.087 36.697,14.585 35.921,14.585
  pour cut-out: 31.115,6.207 32.629,4.694 32.629,3.463 31.711,3.463 31.115,4.059 31.115,5.534
  pour cut-out: 19.517,5.187 19.517,5.454 18.183,5.454 18.183,5.187
  pour cut-out: 13.67,3.596 13.269,3.596 12.956,3.909 12.956,5.451 14.005,6.5 15.922,6.5 16.08,6.342 16.08,5.25 14.282,5.25 14.282,4.208
  pour cut-out: 40.024,5.974 40.915,5.974 42.372,4.517 42.686,4.831 42.741,4.831 42.741,6.931 44.548,8.738 44.548,9.079 44.415,9.212 41.382,9.212 40.024,7.854
  pour cut-out: 49.276,38.544 49.276,40.443 49.248,40.472 52.515,43.739 63.258,43.739 63.258,43.389 58.417,38.548 49.28,38.548
  pour cut-out: 49.313,35.197 49.313,35.289 49.248,35.354 51.463,37.569 59.31,37.569 59.316,37.575 59.771,37.12 59.771,31.726 59.665,31.619 58.775,31.619 55.197,35.197
  pour cut-out: 59.329,6.375 59.329,6.475 59.43,6.576 61.21,6.576 61.774,6.012 61.774,4.919 60.785,4.919
  pour cut-out: 57.45,10.136 57.52,10.206 59.022,10.206 59.131,10.097 59.131,6.9 59.006,6.775 58.929,6.775 57.45,8.254
  pour cut-out: 53.289,19.677 53.354,19.742 54.777,19.742 58.794,15.725 57.425,14.355 57.425,10.302 57.355,10.231 57.255,10.231 57.255,10.27 54.082,13.442 54.082,13.997 53.289,14.79
  pour cut-out: 74.872,2.821 74.943,2.751 75.042,2.751 75.623,3.331 75.623,5.351 74.872,5.351
  pour cut-out: 72.665,2.65 72.665,1.873 72.648,1.856 74.148,1.856 74.772,2.48 74.772,2.58 74.701,2.65
  pour cut-out: 67.086,5.323 67.086,4.164 67.096,4.155 66.727,3.786 66.032,3.786 65.181,4.638 65.628,5.084 65.659,5.084 65.898,5.323
  pour cut-out: 75.9,18.092 75.9,17.341 73.644,17.341 73.198,16.896 73.161,16.934 72.885,16.934 72.885,17.813 73.163,18.092
  pour cut-out: 75.9,20.294 76.011,20.406 76.011,20.423 75.163,21.271 72.251,21.271 72.251,20.362 73.034,19.578 75.174,19.578 75.895,20.299
  region net SL_A: 68.072,33.274 68.072,28.892 71.374,28.892 71.374,33.274
  region net SH_B: 63.881,24.892 63.881,27.94 73.596,27.94 74.549,26.987 83.693,26.987 83.693,19.177 77.978,19.177 75.374,21.78 68.072,21.78 68.072,24.257 67.437,24.892
  region net POWER_LOAD: 15.494,44.069 15.494,38.989 24.003,38.989 24.003,44.069
  region net NetIC4_8: 15.43,38.417 15.43,35.877 16.637,34.671 16.637,32.575 19.939,32.575 19.939,35.877 19.748,36.068 18.669,37.148 18.669,38.417
  region net SL_B: 68.135,19.875 68.135,14.922 71.438,14.922 71.438,19.875
  region net SH_C: 63.436,10.858 63.436,14.351 75.882,14.351 78.168,16.637 83.693,16.637 83.693,7.366 67.754,7.366 67.691,7.429 67.691,10.096 66.929,10.858
  region net SH_A: 63.627,38.544 63.627,43.18 74.676,43.18 80.264,37.592 81.026,37.592 83.693,34.925 83.693,28.067 77.406,28.067 75.882,29.591 75.882,33.465 74.532,34.815 68.008,34.815 68.008,37.846 67.31,38.544

## Silkscreen, mask and mechanical layers (free items; w line width, h text height)
Top Overlay:
  text "GND" at 22.727,3.997 h0.8 r90
  text "SWCLK" at 20.13,3.848 h0.8 r90
  text "SWDIO" at 17.409,3.81 h0.8 r90
  text "ESC 48V-30A FOC" at 28.8,3.276 h1.52

## Dimensions
85,45 to 85,0 on Mechanical 10